# Altium PCB REV11_PCB_DESIGN_LAYOUT.PcbDoc (part 3 of 3)
Units mm, origin at the board's own origin, x right, y up, seen from the top; angles counter-clockwise.
Board outline 97.79 x 93.98 mm, 4 copper layers (L1S-TOP, L2- GND PLANE, L3 - PWR PLANE, L4-BOTTOM), stack 1.636 mm thick; 53 components, 27 nets, 164 pads, 437 vias.
Unrouted connection lines stored in the file: 146.
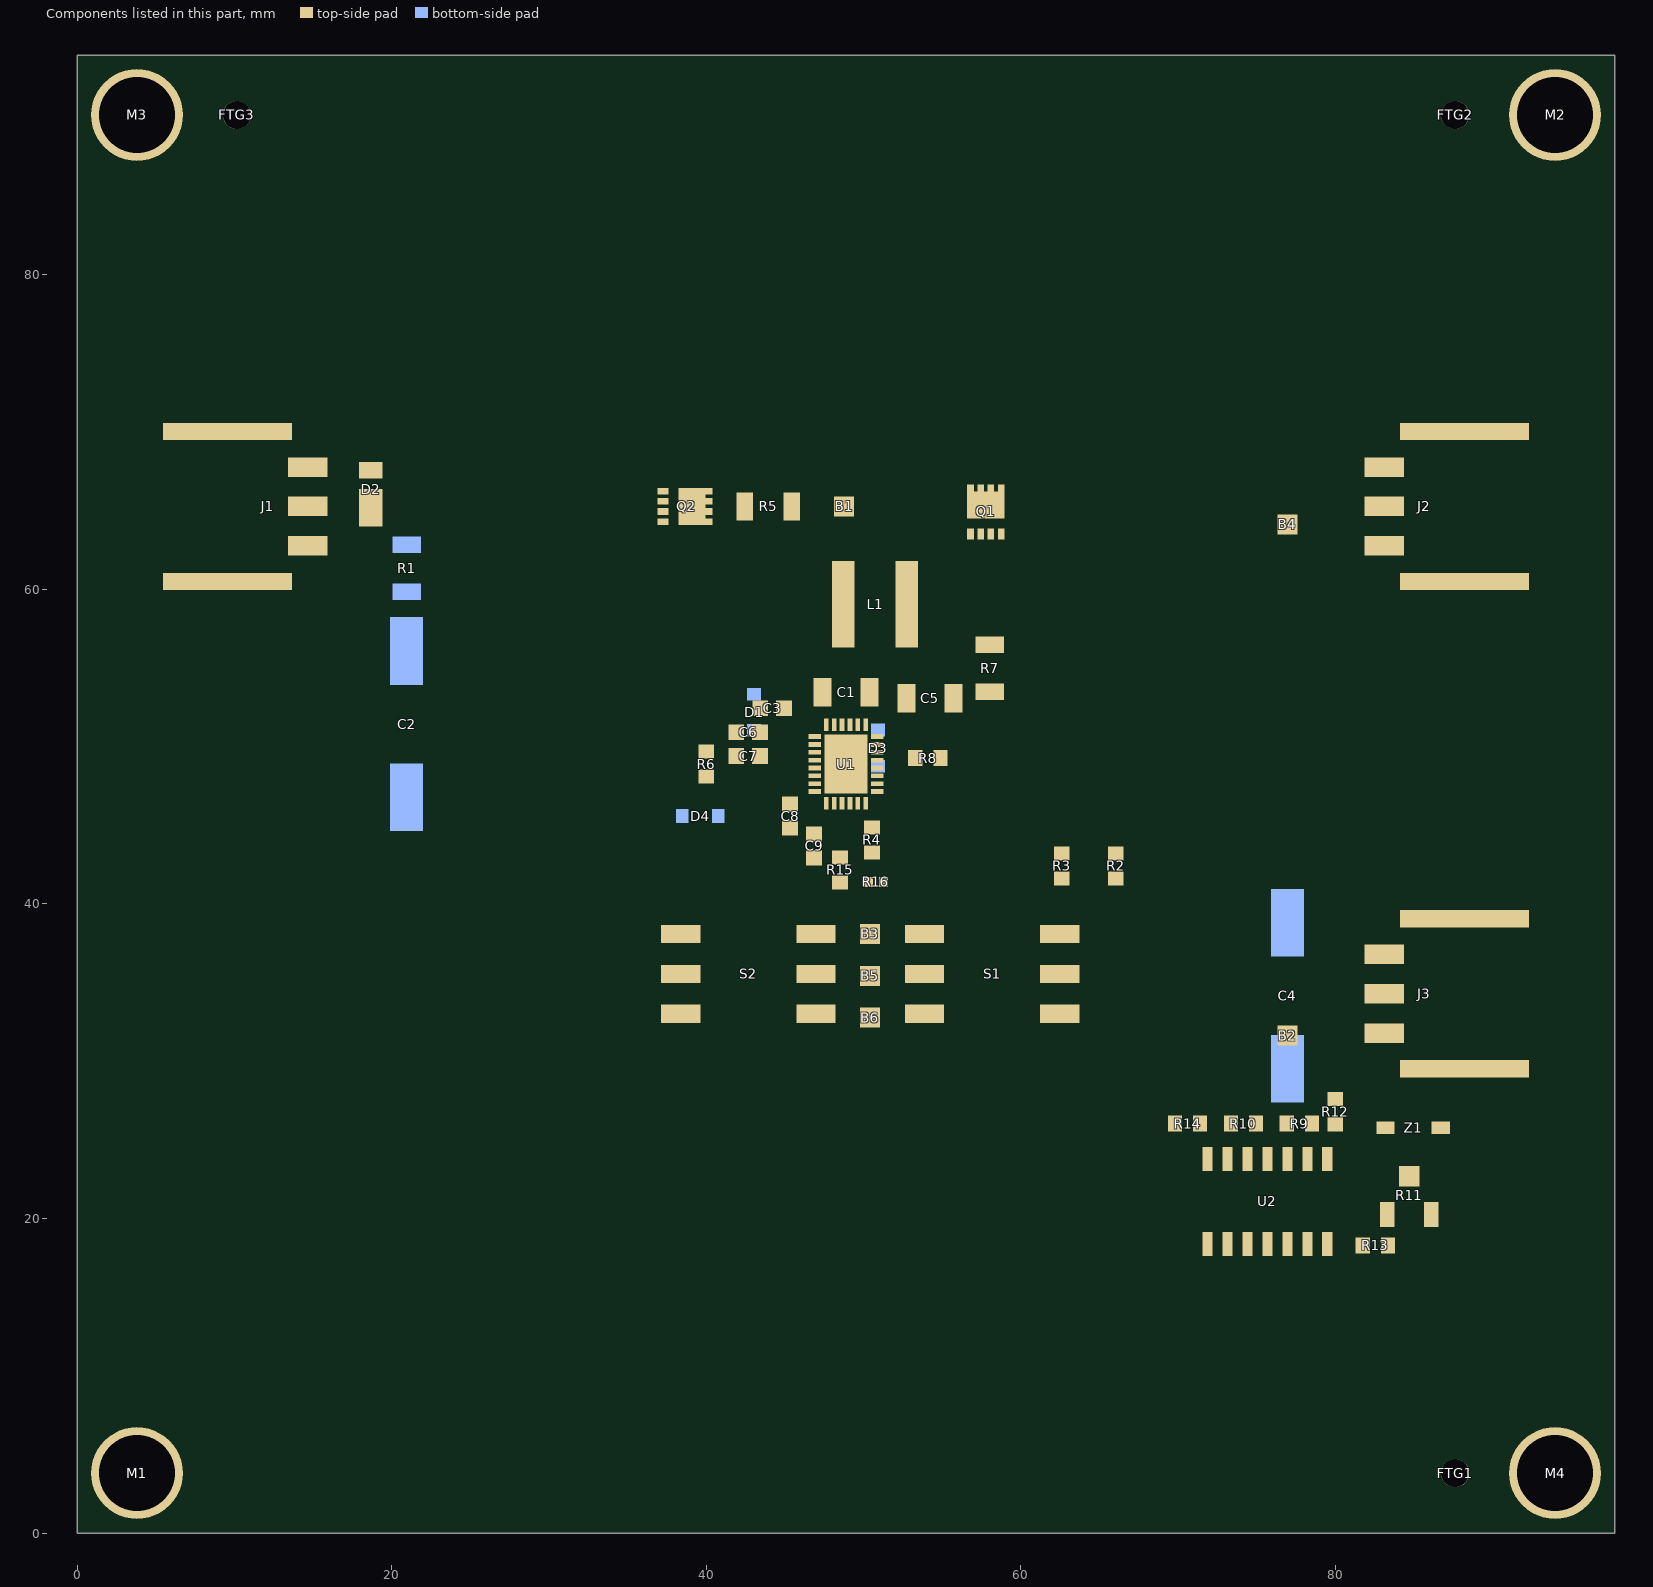
[diagram p4: the components of this part, seen from the top]

## Silkscreen, mask and mechanical layers (free items; w line width, h text height) (continued)
Assembly Drawing Bottom:
  drawing of 919 lines, arcs and shapes, not listed
  text "7    DEMO S/N LABEL" at -8.611,81.686 h2.54
  text "APPLY IN THIS AREA" at -12.192,78.994 h2.54
  text "1630 MCCARTHY BLVD" at -56.07,-13.684 h0.89
  text "APPROVALS" at 8.103,-14.402 h3.81
  text "POWER BY" at -44.051,-14.824 h1.01
  text "MILPITAS, CA 95035" at -56.07,-15.589 h0.89
  text "ANALOG" at -22.122,-15.98 h1.9
  text "PH: (408)432-1900" at -56.07,-17.494 h0.89
  text "DEVICES" at -21.932,-18.927 h1.9
  text "NC" at -0.635,-19.304 h2.54
  text "WWW.ANALOG.COM" at -56.07,-19.399 h0.89
  text "PCB DES." at 11.938,-19.431 h2.54
  text "ZP" at -0.635,-22.86 h2.54
  text "APP ENG." at 12.065,-22.86 h2.54
  text "BOTTOM ASSEMBLY DRAWING:" at -24.282,-24.308 h2.54
  text "TITLE:" at -16.281,-24.308 h2.54
  text "35V/3.2A MULTI-CELL STEP DOWN BATTERY" at -16.51,-27.94 h2.54
  text "CHARGER WITH POWERPATH AND I2C TELEMETRY" at -16.51,-31.115 h2.54
  text "SIZE" at -16.662,-35.611 h2.54
  text "REV." at -69.113,-35.738 h2.54
  text "IC NO." at -22.885,-35.738 h2.54
  text "LTC4162" at -31.115,-36.83 h3.05
  text "11" at -68.58,-39.37 h3.81
  text "DEMO CIRCUIT 2038A-A/R" at -31.75,-39.37 h3.05
  text "N/A" at -16.281,-39.421 h3.05
  text "SHT 2 of 2" at -60.35,-43.866 h2.54
  text "SCALE = NONE" at 6.706,-43.866 h2.54
Board:
  the board outline again, w0.3
Drill Drawing:
  drawing of 1123 lines, arcs and shapes, not listed
  text "REVISION HISTORY" at 207.62,103.327 h3.05
  text "DATE" at 239.776,99.949 h2.54
  text "ECO" at 188.468,99.822 h2.54
  text "APPR" at 227.711,99.822 h2.54
  text "REV" at 194.412,99.771 h2.54
  text "DESCRIPTION" at 204.216,99.695 h2.54
  text "ZP" at 228.981,96.52 h2.54
  text "10-09-18" at 238.76,96.52 h2.54
  text "-" at 189.967,96.469 h2.54
  text "11" at 195.326,96.393 h2.54
  text "PRODUCTION FAB" at 201.93,96.393 h2.54
  text "3.700 \"" at -8.382,93.472 h2.54
  text "LAYER STRUCTURE" at 118.11,92.71 h4.32
  text "L1 - TOP" at 149.752,87.093 h3.05
  text "L2 - GND PLANE" at 149.625,82.902 h3.05
  text "L3 - PWR PLANE" at 149.625,78.33 h3.05
  text "L4 - BOTTOM" at 149.625,73.758 h3.05
  text "NOTES: UNLESS OTHERWISE SPECIFIED" at 127.432,42.469 h5.18
  text "1. FABRICATION: FABRICATION AND ACCEPTANCE TO MEET THE REQUIREMENTS OF IPC-A-600" at 112.776,34.29 h3.17
  text "AND IPC/ANSI-MLL950-C CLASS 2, AOL .25 GENERAL INSPECTION LEVEL II." at 131.191,31.115 h3.17
  text "2. MATERIAL: -LEAD FREE ASSEMBLY COMPLIANT, ISOLA FR-370HR OR EQUIVALENT." at 112.649,26.416 h3.17
  text "-FINISHED THICKNESS TO BE 0.062\" +/- .005\"" at 131.445,22.86 h3.17
  text "-TOTAL OF 4 LAYERS WITH 2 OZ. CU ON THE OUTER LAYERS" at 131.445,19.685 h3.17
  text "AND 1 OZ. CU ON THE INNER LAYERS." at 132.08,16.51 h3.17
  text "-FLAMMABILITY RATING: 94 V-O MINIMUM." at 131.445,13.335 h3.17
  text "3. SIZE: CUT TO DIMENSIONS AND TOLERANCES SHOWN." at 113.03,8.89 h3.17
  text "0.00 ARE PRIMARY DATUMS." at 124.46,5.715 h3.17
  text "4. DRILLING: -DRILL HOLES PER SCHEDULE. PLATE THROUGH" at 112.395,0.635 h3.17
  text "0.00\"" at -8.89,-0.635 h2.54
  text "HOLES WITH COPPER, 0.001\" THICK MIN." at 131.445,-2.54 h3.17
  text "-ALL HOLE SIZES ARE SPECIFIED AFTER PLATING." at 130.175,-5.715 h3.17
  text "0.00\"" at 0.635,-8.255 h2.54 r90
  text "-HOLE LOCATION TOLERANCES ARE +/-0.003\"" at 130.175,-8.89 h3.17
  text "3.850 \"" at 98.171,-9.779 h2.54 r90
  text "IN RELATION TO CENTER" at 130.81,-12.065 h3.17
  text "5. FINISH: -SMOBC USING LPI BOTH SIDES, COLOR GREEN." at 112.395,-17.145 h3.17
  text "-GOLD IMMERSION BOTH SIDES." at 126.365,-20.32 h3.17
  text "-TENT VIAS, TOP AND BOTTOM." at 126.365,-23.495 h3.17
  text "-FOR SILKSCREEN: BOTH SIDES USE WHITE NON-CONDUCTIVE INK." at 126.365,-26.67 h3.17
  text "6. DO NOT ALTER ARTWORK e.g. TO ADD LOGO OR DATE CODE." at 112.395,-31.75 h3.17
  text "PAD SIZE CAN BE MODIFIED TO MEET END FINISH." at 115.57,-34.925 h3.17
  text "7. PCBS ARE TO BE RoHS COMPLIANT." at 112.395,-39.37 h3.17
  text "8 DO NOT ALTER SOLDER MASK MAINTAIN .0018\" OVERSIZE" at 112.395,-43.815 h3.17
  text "ON SMT PADS. A .005\" WEBBING IS REQUIRED BETWEEN SMD PADS." at 114.3,-46.99 h3.17
  text "9. SCORING FOR PANELIZED PCB: \"PRODUCTION FAB ONLY\"" at 112.395,-51.435 h3.17
  text ".020" at 164.34,-61.799 h3.05
  text "x" at 141.797,-65.609 h2.03
  text "x" at 142.75,-65.609 h2.03
  text "x" at 143.702,-65.609 h2.03
  text "x" at 144.655,-65.609 h2.03
  text "x" at 145.607,-65.609 h2.03
  text "x" at 146.56,-65.609 h2.03
  text "x" at 147.512,-65.609 h2.03
  text "x" at 148.465,-65.609 h2.03
  text "x" at 149.417,-65.609 h2.03
  text "x" at 150.37,-65.609 h2.03
  text "x" at 151.322,-65.609 h2.03
  text "x" at 152.275,-65.609 h2.03
  text "x" at 153.227,-65.609 h2.03
  text "x" at 154.18,-65.609 h2.03
  text "x" at 155.132,-65.609 h1.27
  text "x" at 141.797,-68.149 h2.03
  text "x" at 142.75,-68.149 h2.03
  text "x" at 143.702,-68.149 h2.03
  text "x" at 144.655,-68.149 h2.03
  text "x" at 145.607,-68.149 h2.03
  text "x" at 146.56,-68.149 h2.03
  text "x" at 147.512,-68.149 h2.03
  text "x" at 148.465,-68.149 h2.03
  text "x" at 149.417,-68.149 h2.03
  text "x" at 150.37,-68.149 h2.03
  text "x" at 151.322,-68.149 h2.03
  text "x" at 152.275,-68.149 h2.03
  text "x" at 153.227,-68.149 h2.03
  text "x" at 154.18,-68.149 h2.03
  text "x" at 155.132,-68.149 h1.27
  text ".017" at 139.7,-71.755 h3.05
  text "ADDITIONAL REQUREMENT FOR PROTOTYPE FAB ONLY:" at -7.849,-93.091 h3.17
  text "UNLESS OTHERWISE SPECIFIED" at 134.569,-93.396 h1.52
  text "1630 MCCARTHY BLVD" at 230.924,-93.44 h0.89
  text "POWER BY" at 218.905,-94.58 h1.01
  text "APPROVALS" at 165.938,-95.301 h3.81
  text "MILPITAS, CA 95035" at 230.924,-95.345 h0.89
  text "ANALOG" at 196.976,-95.736 h1.9
  text "DIMENSIONS ARE IN INCHES" at 134.569,-95.936 h1.52
  text "PH: (408)432-1900" at 230.924,-97.25 h0.89
  text "1. OUTGOING INSPECTION REPORT (BASED ON ACTUAL MEASUREMENTS AND CROSS SECTION)." at -9.119,-97.536 h3.17
  text "+" at 153.01,-97.663 h1.52
  text "TOLERANCES ON ANGLE  1" at 134.569,-97.968 h1.52
  text "-" at 153.137,-98.298 h1.52
  text "DEVICES" at 196.786,-98.683 h1.9
  text "WWW.ANALOG.COM" at 230.924,-99.155 h0.89
  text "+" at 149.073,-99.441 h1.52
  text "0.XX\" =  0.01\"" at 140.157,-100 h1.52
  text "-" at 149.2,-100.203 h1.52
  text "NC" at 174.092,-100.203 h2.54
  text "PCB DES." at 161.519,-100.457 h2.54
  text "+" at 149.581,-101.346 h1.52
  text "0.XXX\" =  0.005\"" at 139.141,-102.032 h1.52
  text "-" at 149.708,-102.108 h1.52
  text "APP ENG." at 161.519,-103.632 h2.54
  text "ZP" at 173.99,-103.683 h2.54
  text "ADDITIONAL REQUREMENTS FOR PRODUCTION FAB ONLY:" at -8.484,-103.886 h3.17
  text "INTERPRET DIM AND TOL" at 136.093,-104.064 h1.52
  text "TITLE:" at 190.957,-105.461 h2.54
  text "FABRICATION DRAWING:" at 198.577,-105.461 h2.54
  text "PER ASME Y14.5M-1994" at 136.093,-106.096 h1.52
  text "1. PROVIDE COMPLIANCE CERTIFICATES FOR RoHS, REACH AND CONFLICT-FREE MINERALS." at -9.119,-108.966 h3.17
  text "35V/3.2A MULTI-CELL STEP DOWN BATTERY" at 191.11,-108.966 h2.54
  text "THIRD ANGLE PROJECTION" at 134.976,-109.22 h2.03
  text "2. SOLDERABILITY BOARD WITH TEST RESULTS." at -9.119,-112.141 h3.17
  text "CHARGER WITH POWERPATH AND I2C TELEMETRY" at 191.11,-112.141 h2.54
  text "3. OUTGOING INSPECTION REPORT (BASED ON ACTUAL MEASUREMENTS AND CROSS SECTION)." at -9.119,-115.316 h3.17
  text "REV." at 239.243,-116.713 h2.54
  text "SIZE" at 190.195,-116.764 h2.54
  text "IC NO." at 201.625,-116.764 h2.54
  text "LTC4162" at 212.7,-117.221 h3.05
  text "4. VACUUM PACKED WITH DESICCANT." at -9.119,-118.491 h3.17
  text "N/A" at 193.878,-119.939 h3.05
  text "DEMO CIRCUIT 2038A-A/R" at 203.81,-120.396 h3.05
  text "11" at 242.545,-120.396 h3.81
  text "5. FULL PANEL WITH NO REJECT." at -9.119,-121.666 h3.17
  text "DO NOT SCALE DRAWING" at 134.341,-124.46 h2.29
  text "SHT 1 of 1" at 232.74,-124.511 h2.54
  text "SCALE: NONE" at 168.351,-124.638 h2.54
Layer_20:
  lines w0.203: 8.7,-38.163 35.242,-38.163 ; 8.7,-28.003 35.242,-28.003 ; 8.7,-25.463 35.242,-25.463 ; 8.7,-22.924 35.242,-22.924 ; 8.725,-55.944 35.242,-55.944 ; 8.725,-53.404 35.242,-53.404 ; 8.725,-48.323 35.242,-48.323 ; 8.725,-43.243 35.242,-43.243 ; 8.725,-33.084 35.242,-33.084 ; 8.725,-30.543 35.242,-30.543 ; 8.75,-50.863 35.242,-50.863 ; 8.75,-40.703 35.242,-40.703 ; 8.776,-35.623 35.242,-35.623 ; 8.801,-45.783 35.242,-45.783 ; 15.938,-55.944 15.938,-20.511 ; 22.543,-55.944 22.543,-20.587 ; 28.956,-55.944 28.956,-20.511 ; 43.434,-27.749 92.9,-27.749 ; 43.459,-42.989 92.9,-42.989 ; 43.459,-37.91 92.9,-37.91 ; 43.459,-32.829 92.9,-32.829 ; 43.459,-22.669 92.9,-22.669 ; 43.459,-20.13 92.9,-20.13 ; 43.485,-40.45 92.9,-40.45 ; 43.485,-30.29 92.9,-30.29 ; 43.51,-25.209 92.9,-25.209 ; 43.536,-35.369 92.9,-35.369 ; 73.215,-45.593 73.215,-20.193 ; 82.74,-45.593 82.74,-20.193 ; 8.7,-58.483 8.7,-20.511 35.242,-20.511 35.242,-58.483 8.7,-58.483 ; 43.434,-45.593 43.434,-17.653 92.9,-17.653 92.9,-45.593 43.434,-45.593
  text "CHEMISTRY SELECTION" at 59.055,-16.51 h0.89
  text "LEAD ACID CHARGING ALGORITHM VS CHEM1, CHEM0 STATE" at 44.005,-19.494 h0.89
  text "CELLS SELECTION" at 14.668,-19.748 h0.89
  text "CHEMISTRY" at 44.005,-22.034 h0.89
  text "CHEM1" at 75.12,-22.098 h0.89
  text "CHEM0" at 85.281,-22.098 h0.89
  text "# CELLS" at 9.207,-22.415 h0.89
  text "CELLS2" at 16.192,-22.415 h0.89
  text "CELLS1" at 22.86,-22.415 h0.89
  text "CELLS0" at 29.146,-22.415 h0.89
  text "Li-Ion PROGRAMMABLE" at 44.005,-24.638 h0.89
  text "0" at 77.66,-24.638 h0.89
  text "0" at 87.82,-24.638 h0.89
  text "INVALID" at 9.207,-24.828 h0.89
  text "0" at 18.732,-24.828 h0.89
  text "0" at 25.082,-24.828 h0.89
  text "0" at 31.432,-24.828 h0.89
  text "Li-Ion 4.2V / FIXED" at 44.005,-27.178 h0.89
  text "1" at 77.66,-27.178 h0.89
  text "1" at 87.82,-27.178 h0.89
  text "1" at 14.287,-27.368 h0.89
  text "0" at 18.732,-27.368 h0.89
  text "0" at 25.082,-27.368 h0.89
  text "1" at 31.432,-27.368 h0.89
  text "Li-Ion 4.1V / FIXED" at 44.005,-29.718 h0.89
  text "0" at 77.66,-29.718 h0.89
  text "Z" at 87.82,-29.718 h0.89
  text "2" at 14.287,-29.909 h0.89
  text "0" at 18.732,-29.909 h0.89
  text "1" at 25.082,-29.909 h0.89
  text "0" at 31.432,-29.909 h0.89
  text "Li-Ion 4.0V / FIXED" at 44.005,-32.258 h0.89
  text "Z" at 77.66,-32.258 h0.89
  text "0" at 87.82,-32.258 h0.89
  text "3" at 14.287,-32.448 h0.89
  text "0" at 18.732,-32.448 h0.89
  text "1" at 25.082,-32.448 h0.89
  text "1" at 31.432,-32.448 h0.89
  text "Li-FePO4 PROGRAMMABLE" at 44.005,-34.798 h0.89
  text "0" at 77.66,-34.798 h0.89
  text "1" at 87.82,-34.798 h0.89
  text "4" at 14.287,-34.989 h0.89
  text "0" at 18.732,-34.989 h0.89
  text "0" at 25.082,-34.989 h0.89
  text "Z" at 31.432,-34.989 h0.89
  text "Li-FePO4 FIXED FAST CHARGE" at 44.005,-37.338 h0.89
  text "1" at 77.66,-37.338 h0.89
  text "Z" at 87.82,-37.338 h0.89
  text "5" at 14.287,-37.529 h0.89
  text "0" at 18.732,-37.529 h0.89
  text "Z" at 25.082,-37.529 h0.89
  text "0" at 31.432,-37.529 h0.89
  text "Li-FePO4 FIXED STANDARD CHARGE" at 44.005,-39.878 h0.89
  text "Z" at 77.66,-39.878 h0.89
  text "1" at 87.757,-39.878 h0.89
  text "6" at 14.287,-40.069 h0.89
  text "0" at 18.732,-40.069 h0.89
  text "1" at 25.082,-40.069 h0.89
  text "Z" at 31.432,-40.069 h0.89
  text "LEAD ACID FIXED" at 44.005,-42.418 h0.89
  text "Z" at 77.66,-42.418 h0.89
  text "Z" at 87.82,-42.418 h0.89
  text "7" at 14.287,-42.608 h0.89
  text "0" at 18.732,-42.608 h0.89
  text "Z" at 25.082,-42.608 h0.89
  text "1" at 31.432,-42.608 h0.89
  text "LEAD ACID PROGRAMMABLE" at 44.005,-44.958 h0.89
  text "1" at 77.66,-44.958 h0.89
  text "Z" at 87.82,-44.958 h0.89
  text "8" at 14.287,-45.148 h0.89
  text "0" at 18.732,-45.148 h0.89
  text "Z" at 25.082,-45.148 h0.89
  text "Z" at 31.432,-45.148 h0.89
  text "9" at 14.287,-47.688 h0.89
  text "1" at 18.732,-47.688 h0.89
  text "0" at 25.082,-47.688 h0.89
  text "0" at 31.432,-47.688 h0.89
  text "INVALID" at 9.207,-50.228 h0.89
  text "1" at 18.732,-50.228 h0.89
  text "0" at 25.082,-50.228 h0.89
  text "1" at 31.432,-50.228 h0.89
  text "INVALID" at 9.207,-52.768 h0.89
  text "1" at 18.732,-52.768 h0.89
  text "1" at 25.082,-52.768 h0.89
  text "0" at 31.432,-52.768 h0.89
  text "12" at 13.652,-55.308 h0.89
  text "1" at 18.732,-55.308 h0.89
  text "1" at 25.082,-55.308 h0.89
  text "1" at 31.432,-55.308 h0.89
  text "*" at 18.098,-57.848 h1.27
  text "LEAD ACID ONLY" at 19.367,-57.848 h0.89